# EAGLE board FINAL PROJECT (EAGLE 9.6.2)
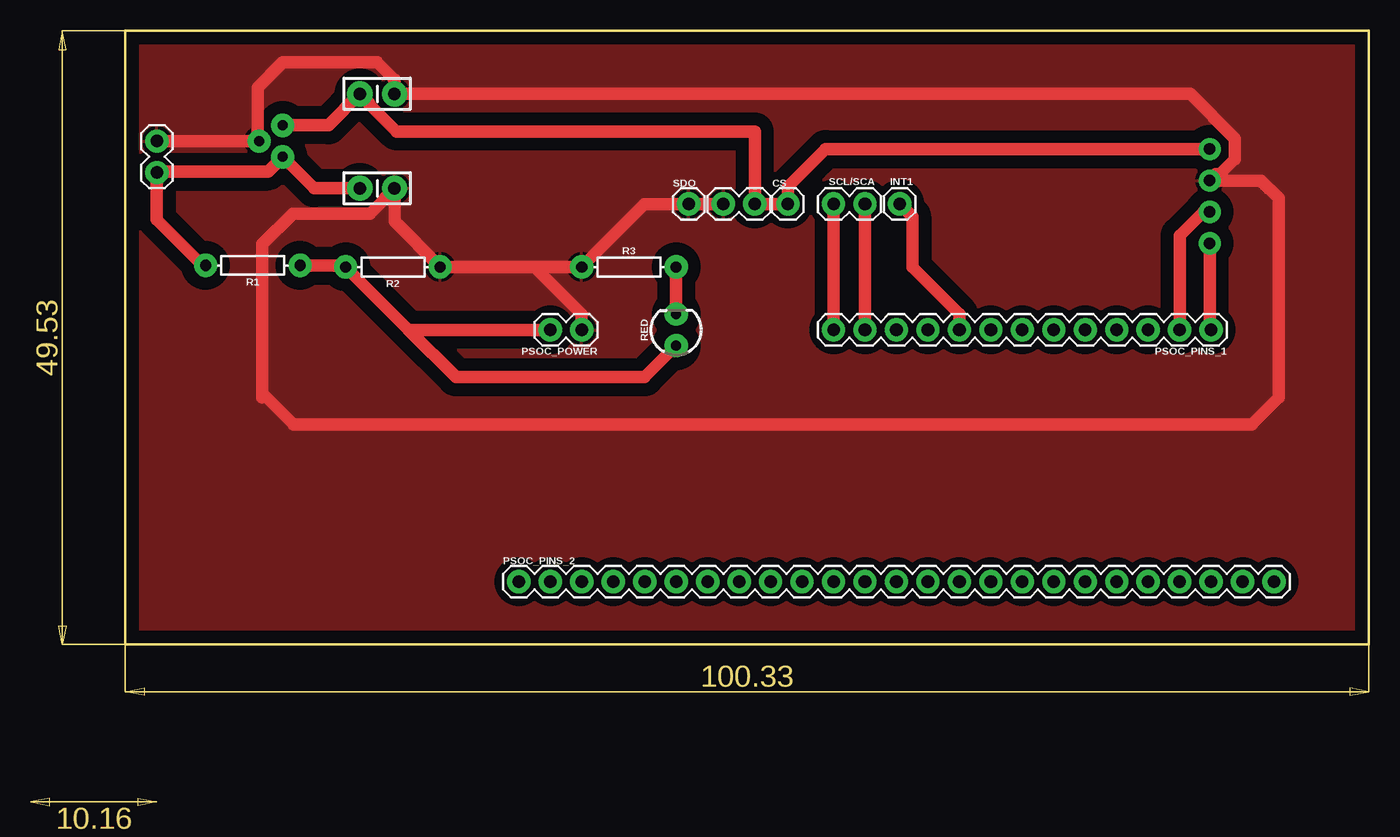
[diagram p0: board, top side]
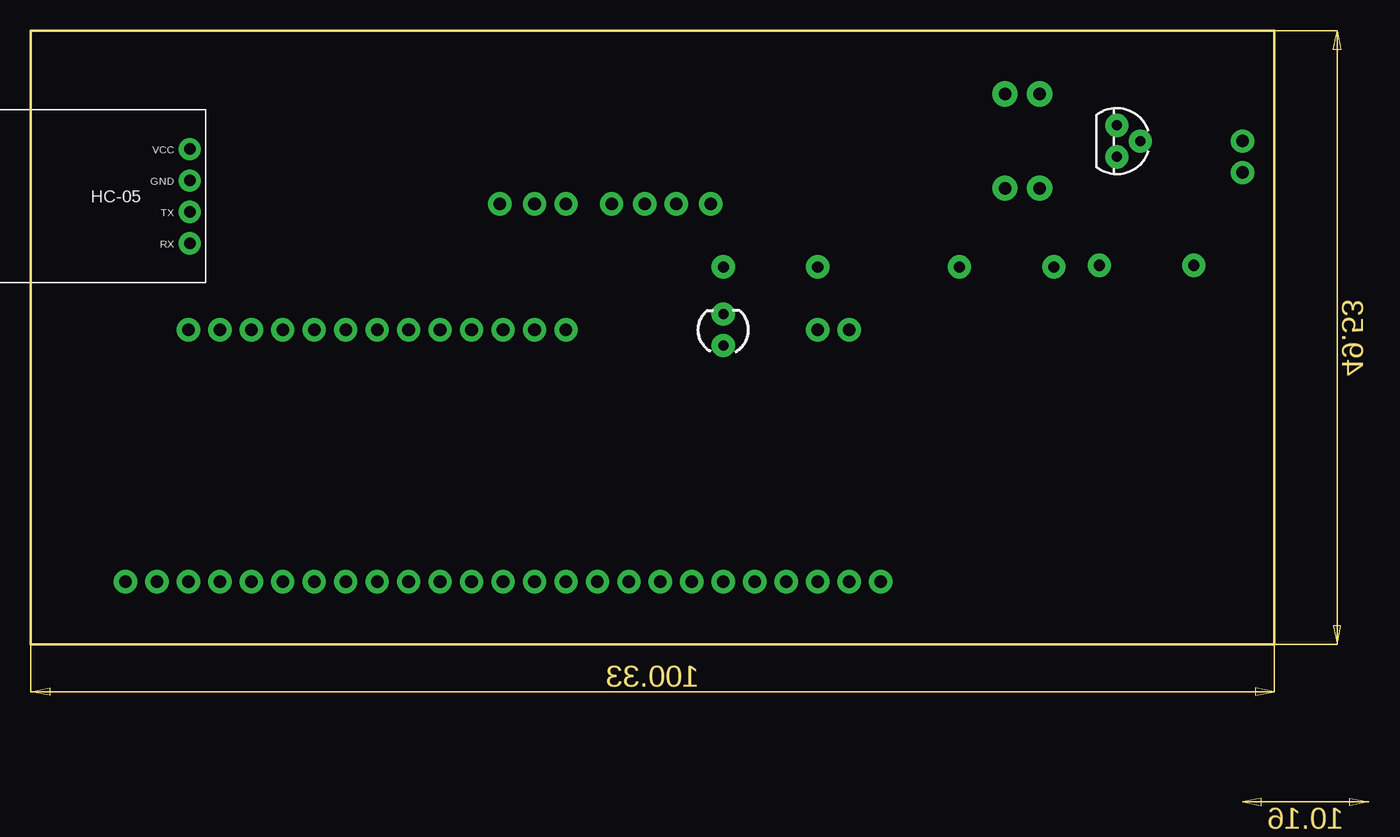
[diagram p1: board, bottom side, seen from below]

Size 100.33 x 49.53 mm. Coordinates in mm from the lower left corner, seen from the top.
Outline: 0,0 0,49.53 100.33,49.53 100.33,0 0,0
Copper layers (1*16): Top 0.035mm / dielectric 1.5mm / Bottom 0.035mm
Design rules "sparkfun *": minimum track width 40mil, minimum drill 20mil, track to track 40mil, track to pad 8mil, pad to pad 8mil, via to via 8mil, smd to smd 8mil, copper to edge 8mil, drill to drill 8mil, minimum pad ring 12mil, minimum via ring 10mil, stop-mask expansion 4mil, vias tented up to drill 20mil, thermal gap 10mil

## Footprints (pad centres in the part's own frame; a part is rotated, then mirrored left to right if it is on the bottom)
CAP-PTH-SMALL-KIT = drill 1.016 pad 2.032: 1 -1.397,0; 2 1.397,0
1X01 = drill 1.016 pad 1.88: 1 0,0
1X02 = drill 1.016 pad 1.88: 1 0,0; 2 2.54,0
BT_BOARD_FOOTPRINT = drill 0.9 pad 1.778: GND -16.51,-1.27; RX -16.51,3.81; TX -16.51,1.27; VCC -16.51,-3.81
1X13 = drill 1.016 pad 1.88: 1 0,0; 2 2.54,0; 3 5.08,0; 4 7.62,0; 5 10.16,0; 6 12.7,0; 7 15.24,0; 8 17.78,0; 9 20.32,0; 10 22.86,0; 11 25.4,0; 12 27.94,0; 13 30.48,0
1X25 = drill 1.016 pad 1.88: 1 0,0; 2 2.54,0; 3 5.08,0; 4 7.62,0; 5 10.16,0; 6 12.7,0; 7 15.24,0; 8 17.78,0; 9 20.32,0; 10 22.86,0; 11 25.4,0; 12 27.94,0; 13 30.48,0; 14 33.02,0; 15 35.56,0; 16 38.1,0; 17 40.64,0; 18 43.18,0; 19 45.72,0; 20 48.26,0; 21 50.8,0; 22 53.34,0; 23 55.88,0; 24 58.42,0; 25 60.96,0
AXIAL-0.3 = drill 0.9 pad 1.88: P$1 -3.81,0; P$2 3.81,0
LED_3MM = drill 0.813 pad 1.88: A -1.27,0; K 1.27,0
TO-92 = drill 0.813 pad 1.88: 1 -1.27,0; 2 0,1.905; 3 1.27,0

## Placement (x,y rotation side)
C3  0.1uF  [CAP-PTH-SMALL-KIT]  20.32,44.45 0 top
C4  0.1uF  [CAP-PTH-SMALL-KIT]  20.32,36.83 0 top
CS  [1X01]  53.47,35.56 0 top
GND/VDD  LIS3DH  [1X02]  48.26,35.56 0 top
HC-05  [BT_BOARD_FOOTPRINT]  104.01,36.2 180 bottom
INT1  [1X01]  62.48,35.56 0 top
J1  BATTERY  [1X02]  2.54,40.64 270 top
PSOC_PINS_1  [1X13]  87.63,25.4 180 top
PSOC_PINS_2  [1X25]  31.75,5.08 0 top
PSOC_POWER  [1X02]  36.83,25.4 180 top
R1  1.2K  [AXIAL-0.3]  10.29,30.61 180 top
R2  1.5K  [AXIAL-0.3]  21.59,30.48 180 top
R3  330  [AXIAL-0.3]  40.64,30.48 0 top
RED  [LED_3MM]  44.45,25.4 90 top
SCL/SCA  [1X02]  57.15,35.56 0 top
SDO  [1X01]  45.47,35.56 0 top
U1  9_to_3.3_VREG  [TO-92]  12.7,40.64 270 bottom

## Library data of the parts
C3 C4 = SparkFun-Capacitors; PROD_ID: CAP-08370
CS GND/VDD INT1 J1 PSOC_PINS_1 PSOC_PINS_2 PSOC_POWER SCL/SCA SDO = SparkFun-Connectors
HC-05 = Bluetooth HC-05
R1-R3 = SparkFun-Resistors; PROD_ID: RES-8371
RED = SparkFun-LED; PROD_ID: DIO-08794
U1 = SparkFun-IC-Power

## Nets
5V: PSOC_POWER.2 R1.P$1 R2.P$2 RED.A
GND: C3.2 C4.2 GND/VDD.1 HC-05.GND J1.1 PSOC_POWER.1 R2.P$1 R3.P$1 SDO.1 U1.2
INT1: INT1.1 PSOC_PINS_1.9
N$1: R3.P$2 RED.K
RX: HC-05.RX PSOC_PINS_1.1
SCA: PSOC_PINS_1.12 SCL/SCA.2
SCL: PSOC_PINS_1.13 SCL/SCA.1
TX: HC-05.TX PSOC_PINS_1.2
VDD: C3.1 CS.1 GND/VDD.2 HC-05.VCC U1.1
VDD1: C4.1 J1.2 R1.P$2 U1.3

## Tracks (layer width: path | path; a pad name or v marks a point on that pad's centre or on a via)
5V
  Top 1.016: 22.86,25.4 R2.P$2 17.65,30.61 R1.P$1 | PSOC_POWER.2 22.86,25.4 | 22.86,25.4 26.67,21.59 41.91,21.59 RED.A
GND
  Top 1.016: 33.02,30.48 R2.P$1 21.72,34.16 C4.2 20.95,36.07 20.95,35.99 19.77,34.8 13.54,34.8 11.05,32.31 11.05,20.32 | 33.02,30.48 36.83,26.67 PSOC_POWER.1 | J1.1 U1.2 | U1.2 10.79,40.34 | U1.2 10.79,40.94 10.67,41.07 10.67,44.96 12.7,46.99 20.32,46.99 21.72,45.59 C3.2 85.93,44.45 89.53,40.85 89.53,39.16 88.34,37.97 88.01,37.97 HC-05.GND 91.65,37.47 93.09,36.02 93.09,19.94 90.93,17.78 13.59,17.78 11.05,20.32 | 11.05,20.32 11.05,19.94 | GND/VDD.1 SDO.1 41.91,35.56 R3.P$1 33.02,30.48
  pour Top (isolate 1): 0,0 100.33,0 100.33,49.53 0,49.53
INT1
  Top 1.016: INT1.1 63.5,34.54 63.5,30.48 67.31,26.67 PSOC_PINS_1.9
N$1
  Top 1.016: R3.P$2 RED.K
RX
  Top 1.016: PSOC_PINS_1.1 87.5,25.53 HC-05.RX
SCA
  Top 1.016: SCL/SCA.2 PSOC_PINS_1.12
SCL
  Top 1.016: SCL/SCA.1 PSOC_PINS_1.13
TX
  Top 1.016: HC-05.TX 87,34.92 85.09,33.02 PSOC_PINS_1.2
VDD
  Top 1.016: HC-05.VCC 56.52,40.01 53.47,36.96 CS.1 GND/VDD.2 50.8,41.4 21.89,41.4 19.68,43.61 19.68,43.69 C3.1 16.38,41.91 U1.1
VDD1
  Top 1.016: R1.P$2 6.22,30.61 2.54,34.29 J1.2 2.62,38.18 11.51,38.18 U1.3 15.24,36.83 C4.1